# Altium PCB SKR MINI E3V2 PCB.pcbdoc (part 2 of 2)
Units mil, origin at the board's own origin, x right, y up, seen from the top; angles counter-clockwise.
Board outline 4610 x 3845 mil, 2 copper layers (Top Layer, Bottom Layer); 144 components, 119 nets, 524 pads, 201 vias.
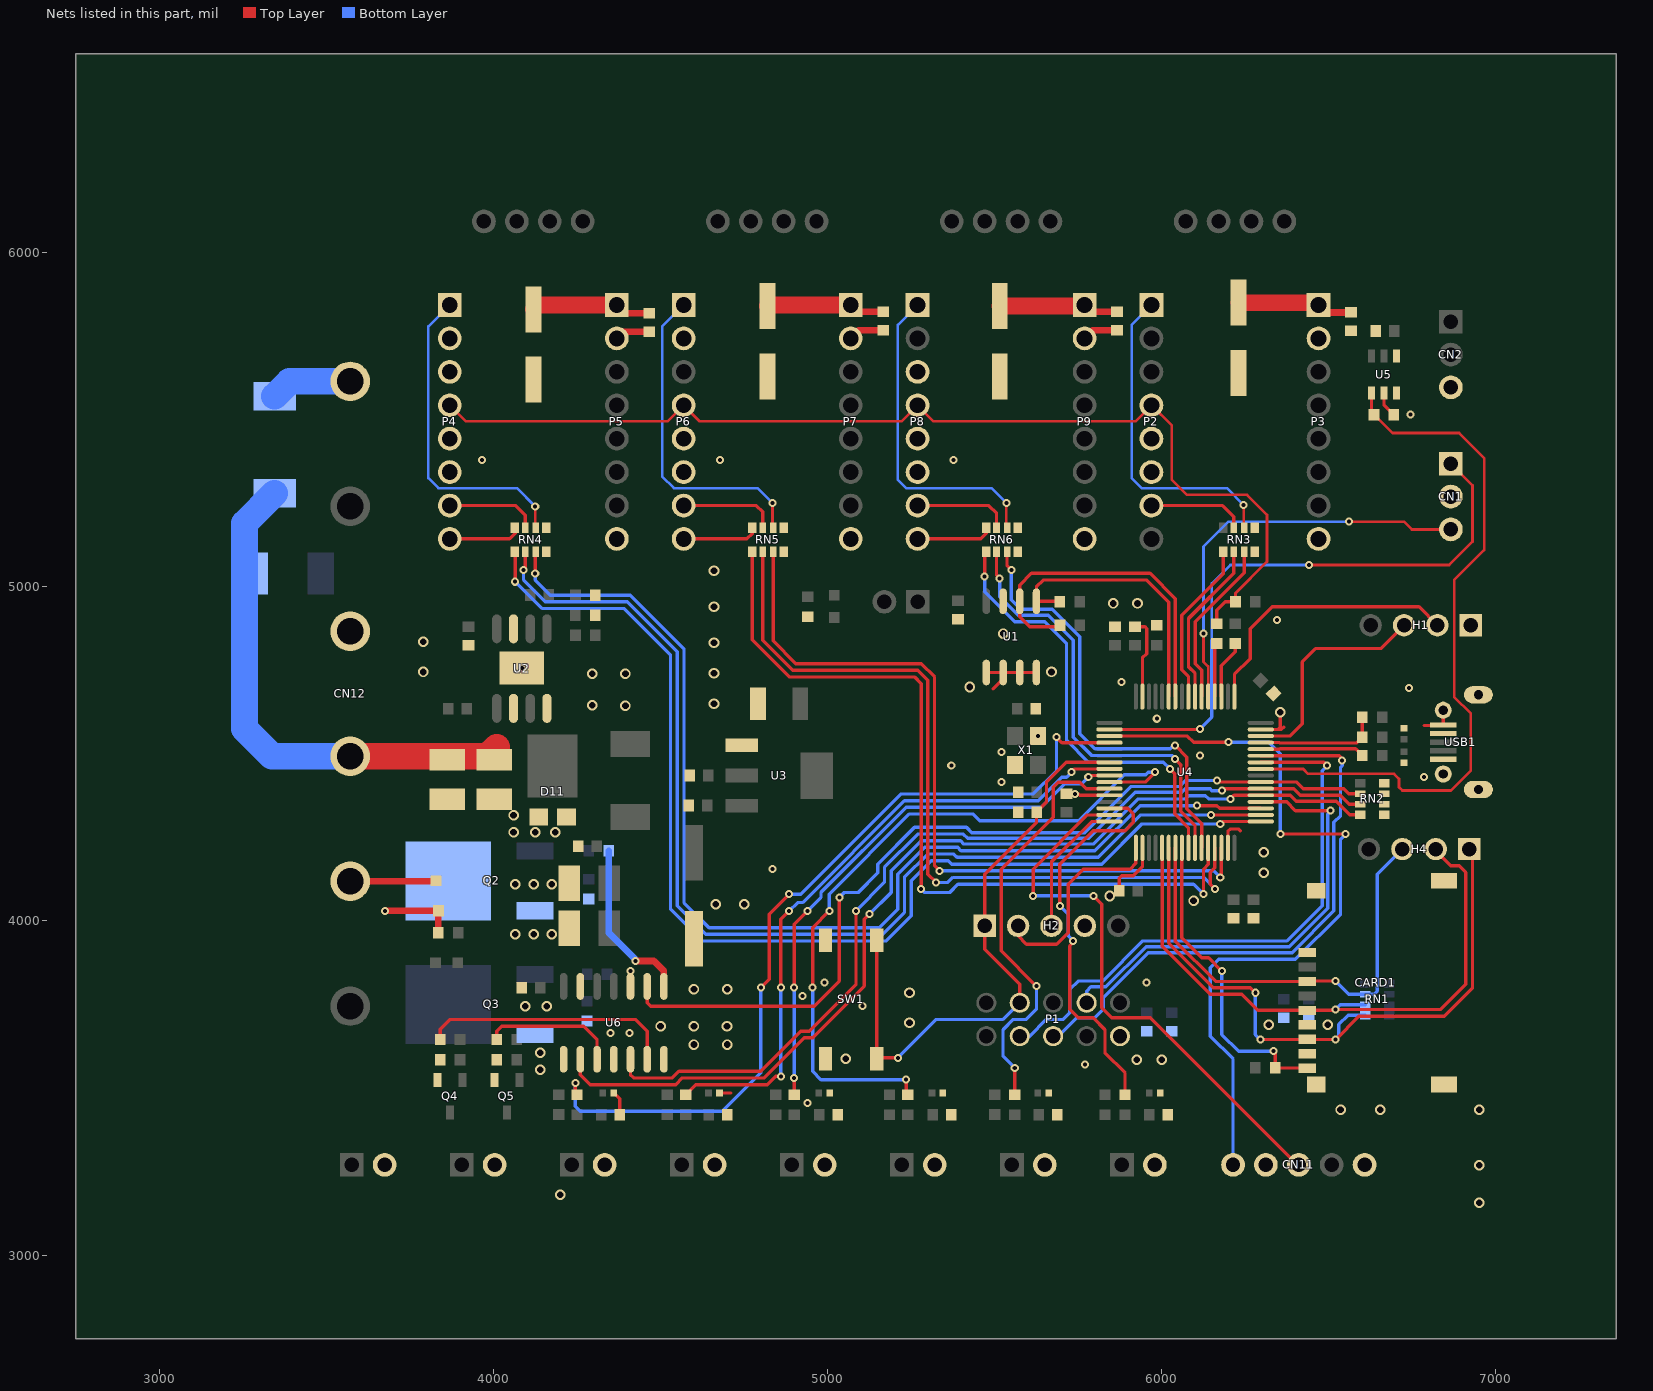
[diagram p2: the nets of this part, all layers, seen from the top]

## Via types
v1: diameter 24.02, hole 12.01, Top Layer to Bottom Layer, 135 vias
v2: diameter 31.5, hole 19.68, Top Layer to Bottom Layer, 64 vias
v3: diameter 47.24, hole 31.5, Top Layer to Bottom Layer, 2 vias

## Nets (pads, with @x,y where several pads share a name; then routed paths per layer and width w, separated by ;. In a path a pad name is that pad's centre, name@x,y a point inside that pad or via, vN(x,y) a via of type N, cw(c..) or ccw(c..) an arc to the next point about the centre after c; other vN are vias at no path point) (continued)
E0-EN: P2.1 RN3.2 | length 980.6
  Top Layer w8: v1(6245,5245) 6245,5178.02 RN3.2@6247,5176.02
  Bottom Layer w8: P2.1@5969.14,5843.15 5910,5784.02 5910,5325 5940,5295 6195,5295 v1(6245,5245)
E0-STOP: R26.1 U4.4 | length 2505.1
  Top Layer w10: v1(4245,3515) 4245,3484.7 R26.1@4250,3479.7 ; v1(4800,3800) 4825,3825 4825,4020 v1(4885,4080) ; v1(5685,4550) 5701.4,4533.6 U4.4@5843.6,4533.6
  Bottom Layer w10: v1(4245,3515) 4245,3445 4260,3430 4685,3430 4800,3545 v1(4800,3800) ; v1(4885,4080) 4920,4080 5220,4380 5615,4380 5685,4450 v1(5685,4550)
E0-STP: P2.7 RN3.3 | length 293.8
  Top Layer w10: P2.7@5969.14,5243.15 6181.85,5243.15 6215.5,5209.5 RN3.3@6215.5,5176.02
E0DIR: RN3.5 U4.56 | length 493.4
  Top Layer w10: U4.56@6079.8,4671.4 6079.8,4731.64 6060,4751.44 6060,4915 6184.1,5039.1 RN3.5@6184.1,5105.22
E0EN: RN3.7 U4.54 | length 502.7
  Top Layer w10: U4.54@6119.2,4671.4 6119.2,4750.8 6100,4770 6100,4895 6247,5042 RN3.7@6247,5105.22
E0STP: RN3.6 U4.55 | length 498
  Top Layer w10: U4.55@6099.5,4671.4 6099.5,4740.42 6080,4759.92 6080,4905 6215.5,5040.5 RN3.6@6215.5,5105.22
FAN: R37.1 U6.6 | length 760.7
  Top Layer w10: R37.1@3840.6,3645 3840.6,3675.6 3870,3705 4425,3705 4460,3670 U6.6@4460,3586
FAN0: R38.1 U6.3 | length 406.7
  Top Layer w10: R38.1@4010.3,3645 4010.3,3670.3 4025,3685 4270,3685 4310,3645 U6.3@4310,3586
FAN0-PWM: RN2.8 U4.37 U6.2 | length 2947.7
  Top Layer w10: U6.2@4260,3586 4260,3540 4290,3510 4545,3510 4565,3530 4810,3530 4930,3650 4955,3650 5110,3805 5110,4005 v1(5125,4020) ; v1(6205,4365) 6216.1,4376.1 U4.37@6296.4,4376.1 6384.35,4376.1 6402.27,4358.19 6521.81,4358.19 6562.2,4317.8 RN2.8@6594.6,4317.8
  Bottom Layer w10: v1(5125,4020) 5190,4085 5190,4150 5280,4240 5397.83,4240 5407.83,4230 5795,4230 5930,4365 6070,4365 6080,4375 6130,4375 6140,4365 v1(6205,4365)
FAN-PWM: RN2.7 U4.38 U6.5 | length 2782.8
  Top Layer w10: U6.5@4410,3586 4410,3540 4420,3530 4535,3530 4555,3550 4800,3550 4920,3670 4945,3670 5085,3810 v1(5085,4030) ; v1(6180,4390) 6185.8,4395.8 U4.38@6296.4,4395.8 6394.49,4395.8 6414.7,4375.59 6534.41,4375.59 6560.7,4349.3 RN2.7@6594.6,4349.3
  Bottom Layer w10: v1(5085,4030) 5170,4115 5170,4160 5270,4260 5406.37,4260 5419.37,4247 5782,4247 5920,4385 6060,4385 6070,4395 6145,4395 6150,4390 v1(6180,4390)
GND: C1.2 C2.2 C3.2 C4.1 C5.1 C6.1 C7.1 C8.1 C9.1 C10.1 C11.1 C12.1 C13.1 C15.1 C16.1 C17.1 C19.1 C20.1 C21.1 C23.1 C24.1 C25.2 C26.1 C27.2 C28.1 C29.1 C30.1 C31.1 C32.1 C33.1 C34.1 C35.1 C36.1 C37.2 C38.1 C39.2 C40.1 C41.2 C42.1 C43.2 C44.1 CARD1.6 CARD1.10 CARD1.11 CARD1.12 CARD1.13 CN1.2 CN2.3 CN4.2 CN5.2 CN6.2 CN7.2 CN8.2 CN9.2 CN11.2 CN11.5 CN12.6 D1.1 D3.1 D4.1 D5.1 D6.1 D7.1 D8.1 D9.1 D10.1 D11.1 D11.2 H1.1 H2.4 P1.2 P3.2 P3.8 P4.2 P4.3 P5.2 P5.8 P6.2 P7.2 P7.8 P8.3 P9.2 P9.8 Q2.3 Q3.3 Q4.2 Q5.2 R1.2 R4.2 R11.1 R13.1 R14.1 R28.1 R32.1 R34.1 R36.1 RN2.1 RN2.2 RN2.3 RN2.4 SW1.3 SW1.4 U1.1 U1.2 U1.3 U1.4 U1.7 U2.4 U2.9 U3.1 U4.12 U4.18 U4.31 U4.47 U4.63 U5.2 U6.1 U6.4 U6.7 U6.10 U6.13 USB1.5 USB1.6 USB1.7 USB1.8 USB1.9 X1.2 X1.4 | length 1831.3
  Top Layer w10: D9.1@4360,3485 4377.6,3467.4 C35.1@4377.6,3420 ; D6.1@4676.4,3485 4710,3485 ; U1.1@5475,4743.5 U1.2@5525,4743.5 ; 5495,4695 5525,4725 U1.2@5525,4743.5 ; U1.4@5625,4743.5 U1.3@5575,4743.5 U1.2@5525,4743.5 ; C7.1@5715,4380 v1(5740,4380) ; v1@5740.2,4380.2 v1(5740,4380) ; U4.12@5843.6,4376.1 5753.9,4376.1 5750,4380 v1(5740,4380) ; C8.1@5872.4,4090 5872.4,4127.4 5880,4135 5915,4135 5942.1,4162.1 U4.18@5942.1,4218.6 ; C4.1@5920,4880.2 5920.2,4880 5950,4880 5955,4875 5955,4800 5942.1,4787.1 U4.63@5942.1,4671.4 ; U4.31@6198,4218.6 6198,4268 6205,4275 6230,4275 6235,4270 ; U4.47@6296.4,4572.9 6357.9,4572.9 6365,4580 ; 6350,4575 6355,4580 v2(6355,4625) ; U5.2@6665,5579.9 6665,5544.7 R11.1@6694.7,5515 ; 6785,4585 6841.5,4585 USB1.5@6842.7,4586.2 6842.7,4630.2 USB1.6@6842.4,4630.5
  Top Layer w20: P5.2@4369.14,5743.15 4389.01,5763.02 C44.1@4466.3,5763.02 ; P7.2@5069.14,5743.15 5094.01,5768.02 C42.1@5166.3,5768.02 ; P9.2@5769.14,5743.15 5794.01,5768.02 C40.1@5866.3,5768.02
  Bottom Layer w80: D3.1@3345,5570 3389.8,5614.8 CN12.6@3571.22,5614.8
  other v1: 4940,3455 5770,3570 4350,3665 4406.61,3665 5105,3745 4925,3775 4990,3815 5955,3815 4410,3850.02 4835,4155 5520,4415 6785,4430 5370,4465 6115,4495.11 5520,4505 5629.4,4553.3 5985,4605 6740.5,4696.72 5880,4715 4085,4757 6345,4900 3965,5380 4677.95,5380 5376.5,5380 6745,5515
  other v2: 6950,3156.87 4200,3180 6950,3268.33 6535,3435 6653.71,3435 6950,3435 4140,3555.13 5925,3585 6000.27,3585 5053.62,3587.8 4140,3605 4600,3630 4699.07,3630 4499.95,3685 4600,3685 4698.89,3685 6319.85,3689 6496.22,3689 5245,3695.14 4095,3745 4160,3745 5245,3785 4600,3795 4699.07,3795 4065,3960 4120,3960 4175,3960 4665,4050 4750.68,4050 6095,4060 5844.7,4074.5 4065,4110 4120,4110 4175,4110 6305,4143.85 6305,4205 4060,4265 4125,4265 4185,4265 4060,4316.32 4395,4644.2 4295,4645.26 4660,4650 5425,4700 4295,4740 4395,4740 4660,4740.85 3790,4745 5670,4745 4660,4832.91 3790,4835 5525,4860 4660,4940 5855,4950 5927.34,4950 4660,5047.73
HE0: R39.1 U6.8 | length 506.7
  Top Layer w20: v1(4425,3880) 4480,3880 4510,3850 U6.8@4510,3804
  Bottom Layer w20: R39.1@4344.7,4210 4344.7,3965.3 4425,3885 v1(4425,3880)
HE0-PWM: RN2.6 U4.39 U6.9 | length 2658.8
  Top Layer w10: U6.9@4460,3804 4460,3755 4470,3745 4960,3745 5035,3820 v1(5035,4070) ; v1(6165,4420) 6169.5,4415.5 U4.39@6296.4,4415.5 6403.51,4415.5 6423.33,4395.68 6544.32,4395.68 6559.2,4380.8 RN2.6@6594.6,4380.8
  Bottom Layer w10: v1(5035,4070) 5050,4085 5091.42,4085 5150,4143.58 5150,4170 5260,4280 5415.62,4280 5431.62,4264 5769,4264 5907,4402 6052,4402 6070,4420 v1(6165,4420)
HE0_CT: CN12.2 LED4.2 Q2.2 | length 257.3
  Top Layer w20: CN12.2@3571.22,4118.8 3826.8,4118.8 LED4.2@3828,4120
LCD-EN: P1.3 U4.36 | length 1374.6
  Top Layer w10: U4.36@6296.4,4356.4 6373.6,4356.4 6400,4330 v1(6505,4330)
  Bottom Layer w10: P1.3@5775,3755 5775,3790 5788,3803 5833,3803 5953,3923 6382.04,3923 6497,4037.96 6497,4320 6505,4328 v1(6505,4330)
NEO: R11.2 U4.41 U5.1 | length 2139.6
  Top Layer w8: U4.41@6296.4,4454.8 6423.39,4454.8 6438.14,4440.06 6694.94,4440.06 6710,4425 6710,4400 6720,4390 6865,4390 6925,4450 6925,4620 6875,4670 6875,5020 6965,5110 6965,5385 6890,5460 6690.3,5460 R11.2@6635.3,5515
  Top Layer w10: U5.1@6627.6,5579.9 6627.6,5522.7 R11.2@6635.3,5515
PC12: CN1.3 U4.53 | length 1235.1
  Top Layer w8: v1(6125,4860) 6125,4775 6138.9,4761.1 U4.53@6138.9,4671.4 ; v1(6560,5195) 6725,5195 6748.4,5171.6 CN1.3@6865,5171.6
  Bottom Layer w8: v1(6125,4860) 6125,5120 6200,5195 v1(6560,5195)
PROBE: CN11.1 U4.3 | length 2294.2
  Top Layer w10: U4.3@5843.6,4553.3 6076.7,4553.3 6095,4535 v1(6200,4535) ; v1@6350,4260 v1(6550,4260)
  Bottom Layer w10: v1(6200,4535) 6320,4535 6355,4500 v1(6355,4260) ; CN11.1@6213.2,3270 6213.2,3586.8 6145,3655 6145,3860 6170,3885 6400,3885 6535,4020 6535,4245 v1(6550,4260)
PS-ON: CN1.1 U4.2 | length 1813.9
  Top Layer w8: v1(6440,5065) 6860,5065 6930,5135 6930,5303.4 CN1.1@6865,5368.4
  Top Layer w10: U4.2@5843.6,4572.9 6112.9,4572.9 v1(6115,4575)
  Bottom Layer w8: 6150,4839.6 6150,5010 6205,5065 v1(6440,5065)
  Bottom Layer w10: v1(6115,4575) 6150,4610 6150,4839.6
RESET: C3.1 H2.1 P1.7 SW1.1 SW1.2 U4.7 | length 1845.2
  Top Layer w10: SW1.1@5146.8,3942.2 SW1.2@5146.8,3587.8 5149,3590 v1(5210,3590) ; P1.7@5575,3755 5575,3810 5470,3915 H2.1@5470,3985 5470,4140 5625.2,4295.2 C3.1@5625.2,4325 5655,4354.8 5655,4415 5714.5,4474.5 U4.7@5843.6,4474.5
  Bottom Layer w10: v1(5210,3590) 5325,3705 5525,3705 P1.7@5575,3755
RX1: P1.6 U4.43 | length 1728.6
  Top Layer w10: U4.43@6296.4,4494.2 6530.8,4494.2 6540,4485 v1(6540,4480)
  Bottom Layer w10: P1.6@5675,3655 5690,3655 5745,3710 5800,3710 5825,3735 5825,3770 5960,3905 6390,3905 6515,4030 6515,4295 6535,4315 6535,4460 6540,4465 v1(6540,4480)
RX2: H2.2 U4.17 | length 624.3
  Top Layer w10: H2.2@5570,3985 5570,3955 5595,3930 5685,3930 5720,3965 5720,4110 5765,4155 5905,4155 5922.4,4172.4 U4.17@5922.4,4218.6
RX4: R31.1 U4.52 | length 161.9
  Top Layer w10: U4.52@6158.6,4671.4 6158.6,4824.2 R31.1@6165,4830.6
SCL1: R2.1 U1.6 U4.58 | length 1034.2
  Top Layer w10: R2.1@5695.3,4885 5690.3,4880 5605,4880 5575,4910 U1.6@5575,4956.5 5575,5005 5610,5040 5965,5040 6040.5,4964.5 U4.58@6040.5,4671.4
SD-DET: CARD1.9 R10.1 U4.24 | length 943.6
  Top Layer w10: U4.24@6060.2,4218.6 6060.2,3949.8 6120,3890 6140,3890 v1(6180,3850) ; v1(6335,3610) 6339.7,3605.3 R10.1@6339.7,3560 6434.4,3560 CARD1.9@6435.3,3559.1
  Bottom Layer w10: v1(6180,3850) 6180,3660 6230,3610 v1(6335,3610)
SDA1: R3.1 U1.5 U4.59 | length 828.3
  Top Layer w10: R3.1@5695,4955 5693.5,4956.5 U1.5@5625,4956.5 5625,5000 5645,5020 5955,5020 6020.8,4954.2 U4.59@6020.8,4671.4
SERVOS: CN11.3 U4.15 | length 1685.7
  Top Layer w10: v1(5615,4075) 5615,4155 5777,4317 U4.15@5843.6,4317 ; v1(5795,4075) 5820,4050 5820,3740 5850,3710 5965.92,3710 6405.92,3270 CN11.3@6410,3270
  Bottom Layer w10: v1(5615,4075) v1(5795,4075)
SPI1-MISO: CARD1.7 H4.1 RN1.1 U4.22 | length 2011.1
  Top Layer w10: U4.22@6020.8,4218.6 6020.8,3933.74 6154.54,3800 6265,3800 v1(6280,3785) ; v1(6295,3645) 6434.5,3645 CARD1.7@6435.3,3645.8 6436.1,3645 v1(6520,3645) 6590,3715 6845,3715 6930,3800 6930,4205 H4.1@6920,4215
  Bottom Layer w10: v1(6280,3785) 6280,3660 v1(6295,3645) ; v1(6520,3645) 6530,3655 6530,3690 6557.8,3717.8 RN1.1@6609.6,3717.8
SPI1-MOSI: CARD1.3 H4.3 RN1.3 U4.23 | length 1410.2
  Top Layer w10: U4.23@6040.5,4218.6 6040.5,3939.5 6161.2,3818.8 CARD1.3@6435.3,3818.8 6436.5,3820 v1(6520,3820)
  Bottom Layer w10: v1(6520,3820) 6559.2,3780.8 RN1.3@6609.6,3780.8 6635.8,3780.8 6645,3790 6645,4140 H4.3@6720,4215
SPI1-SCK: CARD1.5 H4.2 RN1.2 U4.21 | length 1867.7
  Top Layer w10: U4.21@6001.1,4218.6 6001.1,3923.9 6145,3780 6240,3780 6287.8,3732.2 CARD1.5@6435.3,3732.2 6517.2,3732.2 v1(6520,3735) 6835,3735 6910,3810 6910,4145 6890,4165 6865,4165 6820,4210 H4.2@6820,4215
  Bottom Layer w10: v1(6520,3735) 6534.3,3749.3 RN1.2@6609.6,3749.3
SWCLK: H1.2 U4.49 | length 832.9
  Top Layer w10: U4.49@6217.6,4671.4 6217.6,4737.6 6265,4785 6265,4875 6330,4940 6770,4940 H1.2@6825,4885
SWDIO: H1.3 U4.46 | length 674.4
  Top Layer w10: U4.46@6296.4,4553.3 6383.3,4553.3 6420,4590 6420,4775 6460,4815 6655,4815 H1.3@6725,4885
TH0: R15.1 U4.14 | length 1180.8
  Top Layer w10: v1(5695,4045) 5695,4170 5795,4270 5890,4270 5915,4295 5915,4320 5898.3,4336.7 U4.14@5843.6,4336.7 ; v1(5735,3940) 5735,3935 5725,3925 5725,3735 5750,3710 5795,3710 5830,3675 5830,3605 5890,3545 R15.1@5890,3479.7
  Bottom Layer w10: v1(5695,4045) 5720,4020 5720,3955 v1(5735,3940)
THB: R16.1 U4.11 | length 1290.1
  Top Layer w10: R16.1@5560,3479.7 v1(5560,3560) ; v1(5625,3805) 5520,3910 5520,4155 5675,4310 5675,4400 5690,4415 5755,4415 5774.2,4395.8 U4.11@5843.6,4395.8
  Bottom Layer w10: v1(5560,3560) 5525,3595 5525,3675 5555,3705 5595,3705 5625,3735 v1(5625,3805)
TX1: P1.8 U4.42 | length 1736.3
  Top Layer w10: U4.42@6296.4,4474.5 6485.5,4474.5 v1(6495,4465)
  Bottom Layer w10: P1.8@5575,3655 5605,3655 5655,3705 5705,3705 5725,3725 5725,3795 5750,3820 5823.54,3820 5943.54,3940 6375,3940 6480,4045 6480,4450 v1(6495,4465)
TX2: H2.3 U4.16 | length 415.6
  Top Layer w10: H2.3@5670,3985 5670,4177.3 5790.1,4297.4 U4.16@5843.6,4297.4
TX4: R27.1 U4.51 | length 176.2
  Top Layer w10: U4.51@6178.3,4671.4 6178.3,4763.3 6220,4805 R27.1@6220,4830.3
UART: P2.4 P4.4 P6.4 P8.4 R31.2 R33.2 | length 3201.9
  Top Layer w8: P4.4@3869.14,5543.15 3917.29,5495 4520.98,5495 P6.4@4569.14,5543.15 4617.29,5495 5220.98,5495 P8.4@5269.14,5543.15 5317.29,5495 5920.98,5495 P2.4@5969.14,5543.15 6030,5482.29 6030,5320 6075,5275 6255,5275 6315,5215 6315,5075 6220.6,4980.6 R33.2@6220.6,4955
  Top Layer w10: R31.2@6165,4889.7 6165,4930 6190,4955 R33.2@6220.6,4955
USB_DN: R6.1 U4.44 | length 313
  Top Layer w9.7: U4.44@6296.4,4513.9 6352.3,4513.9 6353.8,4515.4 6579.9,4515.4 R6.1@6600.3,4495
USB_DP: R5.1 R8.1 U4.45 | length 371.9
  Top Layer w9.7: U4.45@6296.4,4533.6 6352.3,4533.6 6353.8,4532.1 6582.4,4532.1 R5.1@6600.3,4550
  Top Layer w10: R5.1@6600.3,4550 R8.1@6600.3,4610
VIN: C19.2 C24.2 C37.1 C38.2 C39.1 C40.2 C41.1 C42.2 C43.1 C44.2 CN12.3 CN12.4 CN13.2 CN14.2 D3.2 F1.2 P3.1 P5.1 P7.1 P9.1 R29.2 R30.2 U2.2 | length 3194.9
  Top Layer w20: v1(3675,4030) R29.2@3835.3,4030 3835,4029.7 R30.2@3835,3965 ; P5.1@4369.14,5843.15 4394.07,5818.22 C44.2@4466.3,5818.22 ; P7.1@5069.14,5843.15 5089.07,5823.22 C42.2@5166.3,5823.22 ; P9.1@5769.14,5843.15 5789.07,5823.22 C40.2@5866.3,5823.22 ; P3.1@6469.14,5843.15 6491.47,5820.82 C38.2@6566.3,5820.82
  Top Layer w50: C41.1@4120,5830.1 4133.05,5843.15 P5.1@4369.14,5843.15 ; C43.1@4820,5840.1 4823.05,5843.15 P7.1@5069.14,5843.15 ; C39.1@5515,5840.1 5766.08,5840.1 P9.1@5769.14,5843.15 ; C37.1@6230,5850.1 6462.19,5850.1 P3.1@6469.14,5843.15
  Top Layer w80: CN12.3@3571.22,4492.8 3982.8,4492.8 4010,4520
  Bottom Layer w80: D3.2@3345,5279.8 3255,5189.8 3255,5050 3255,4575 3337.2,4492.8 CN12.3@3571.22,4492.8
X-DIR: P4.8 RN4.4 | length 219.2
  Top Layer w10: P4.8@3869.14,5143.15 4048.15,5143.15 4065,5160 4065,5175.12 RN4.4@4064.1,5176.02
X-EN: P4.1 RN4.2 | length 964.7
  Top Layer w8: v1(4125,5240) 4125,5178.02 RN4.2@4127,5176.02
  Bottom Layer w8: P4.1@3869.14,5843.15 3805,5779.02 3805,5325 3835,5295 4070,5295 v1(4125,5240)
X-STOP: R20.1 U4.8 | length 1947.8
  Top Layer w10: R20.1@4575,3479.7 4605.3,3510 4820,3510 4845,3535 v1(4860,3535) ; v1(4860,3800) 4860,4005 v1(4885,4030) ; v1(5730,4445) 5739.8,4454.8 U4.8@5843.6,4454.8
  Bottom Layer w10: v1(4860,3535) v1(4860,3800) ; v1(4885,4030) 4910,4055 4925,4055 5230,4360 5630,4360 5700,4430 5715,4430 v1(5730,4445)
X-STP: P4.7 RN4.3 | length 276.7
  Top Layer w10: P4.7@3869.14,5243.15 4066.85,5243.15 4095.5,5214.5 RN4.3@4095.5,5176.02
XDIR: RN4.5 U4.33 | length 3430.3
  Top Layer w10: RN4.5@4064.1,5105.22 4065,5104.32 v1(4065,5015) ; v1(6175,4290) 6182.4,4297.4 U4.33@6296.4,4297.4
  Bottom Layer w10: v1(4065,5015) 4145,4935 4390,4935 4530,4795 4530,4035 4625,3940 5175,3940 5250,4015 5250,4120 5310,4180 5361.72,4180 5371.72,4170 5820,4170 5940,4290 v1(6175,4290)
XEN: RN4.7 U4.35 | length 3357.8
  Top Layer w10: v1(4125,5040) 4125,5103.23 RN4.7@4127,5105.22 ; v1(6105,4345) 6165,4345 6173.3,4336.7 U4.35@6296.4,4336.7
  Bottom Layer w10: v1(4125,5040) 4125,5020 4170,4975 4410,4975 4570,4815 4570,4055 4645,3980 5155,3980 5210,4035 5210,4140 5290,4220 5388.94,4220 5398.94,4210 5800,4210 5935,4345 v1(6105,4345)
XSTP: RN4.6 U4.34 | length 3396.3
  Top Layer w10: v1(4090,5050) 4095.5,5055.5 RN4.6@4095.5,5105.22 ; v1(6147,4317) U4.34@6296.4,4317
  Bottom Layer w10: v1(4090,5050) 4090,5020 4155,4955 4400,4955 4550,4805 4550,4045 4635,3960 5165,3960 5230,4025 5230,4130.79 5299.21,4200 5377.19,4200 5387.19,4190 5810,4190 5937,4317 v1(6147,4317)
Y-DIR: P6.8 RN5.4 | length 228.5
  Top Layer w10: P6.8@4569.14,5143.15 4758.15,5143.15 4774.1,5159.1 RN5.4@4774.1,5176.02
Y-EN: P6.1 RN5.2 | length 977.7
  Top Layer w8: v1(4835,5250) 4835,5178.02 RN5.2@4837,5176.02
  Bottom Layer w8: P6.1@4569.14,5843.15 4505,5779.02 4505,5330 4540,5295 4790,5295 v1(4835,5250)
Y-STOP: R22.1 U4.9 | length 1647.1
  Top Layer w10: R22.1@4900,3479.7 v1(4900,3530) ; v1(4900,3800) 4900,3990 v1(4940,4030) ; v1(5780,4430) 5785.2,4435.2 U4.9@5843.6,4435.2
  Bottom Layer w10: v1(4900,3530) v1(4900,3800) ; v1(4940,4030) 4980,4070 4980,4085 5235,4340 5640,4340 5710,4410 5760,4410 v1(5780,4430)
Y-STP: P6.7 RN5.3 | length 292.6
  Top Layer w10: P6.7@4569.14,5243.15 4786.85,5243.15 4805.5,5224.5 RN5.3@4805.5,5176.02
YDIR: RN5.5 U4.28 | length 2455.7
  Top Layer w10: RN5.5@4774.1,5105.22 4774.1,4840.9 4885,4730 5260,4730 5280,4710 v1(5280,4095) ; v1(6125,4080) 6125,4155 6138.9,4168.9 U4.28@6138.9,4218.6
  Bottom Layer w10: v1(5280,4095) 5290,4085 5365,4085 5390,4110 6095,4110 v1(6125,4080)
YEN: RN5.7 U4.30 | length 2319.4
  Top Layer w10: RN5.7@4837,5105.22 4837,4838 4905,4770 5280,4770 5320,4730 5320,4165 v1(5335,4150) ; v1(6175,4130) 6178.3,4133.3 U4.30@6178.3,4218.6
  Bottom Layer w10: v1(5335,4150) 6155,4150 v1(6175,4130)
YSTP: RN5.6 U4.29 | length 2416.2
  Top Layer w10: RN5.6@4805.5,5105.22 4805.5,4839.5 4895,4750 5270,4750 5300,4720 5300,4140 v1(5325,4115) ; U4.29@6158.6,4218.6 6158.6,4158.6 6145,4145 6145,4110 v1(6160,4095)
  Bottom Layer w10: v1(5325,4115) 5360,4115 5375,4130 6125,4130 v1(6160,4095)
Z-DIR: P8.8 RN6.4 | length 229.2
  Top Layer w10: P8.8@5269.14,5143.15 5458.15,5143.15 5475,5160 5475,5175.12 RN6.4@5474.1,5176.02
Z-EN: P8.1 RN6.2 | length 976.4
  Top Layer w8: v1(5535,5250) 5535,5178.02 RN6.2@5537,5176.02
  Bottom Layer w8: P8.1@5269.14,5843.15 5210,5784.02 5210,5320 5235,5295 5490,5295 v1(5535,5250)
Z-STOP: R24.1 U4.10 | length 2180.1
  Top Layer w10: v1(4955,3800) 4955,3980 v1(5005,4030) ; v1(5235,3525) 5235,3484.4 R24.1@5240,3479.4 ; U4.10@5843.6,4415.5 5950.5,4415.5 v1(5980,4445)
  Bottom Layer w10: v1(4955,3800) 4955,3550 4980,3525 v1(5235,3525) ; v1(5005,4030) 5005,4080 5245,4320 5435,4320 5455,4300 5750.96,4300 5887.96,4437 5952,4437 5960,4445 v1(5980,4445)
Z-STP: P8.7 RN6.3 | length 289.6
  Top Layer w10: P8.7@5269.14,5243.15 5481.85,5243.15 5505.5,5219.5 RN6.3@5505.5,5176.02
ZDIR: RN6.5 U4.25 | length 1325.4
  Top Layer w10: v1(5470,5030) 5470,5101.13 RN6.5@5474.1,5105.22 ; v1(6025,4455) 6039,4441 6039,4320.09 6079.8,4279.29 U4.25@6079.8,4218.6
  Bottom Layer w10: v1(5470,5030) 5470,4985 5560,4895 5650,4895 5715,4830 5715,4540 5780,4475 6005,4475 v1(6025,4455)
ZEN: RN6.7 U4.27 | length 1332.9
  Top Layer w10: RN6.7@5537,5105.22 5537,5063 v1(5550,5050) ; v1(6040,4525) 6075,4490 6075,4335 6119.2,4290.8 U4.27@6119.2,4218.6
  Bottom Layer w10: v1(5550,5050) 5550,4960.46 5577.46,4933 5672,4933 5755,4850 5755,4560 5800,4515 6025,4515 v1@6035,4525
ZSTP: RN6.6 U4.26 | length 1326
  Top Layer w10: RN6.6@5505.5,5105.22 5505.5,5034.5 v1(5515,5025) ; v1(6040,4485) 6057,4468 6057,4327.54 6099.5,4285.04 U4.26@6099.5,4218.6
  Bottom Layer w10: v1(5515,5025) 5515,4970 5570,4915 5660,4915 5735,4840 5735,4550 5790,4495 6030,4495 v1(6040,4485)
"": CARD1.1 CARD1.8 P2.5 P2.6 P4.5 P4.6 P6.5 P6.6 P8.5 P8.6 RN3.1 RN3.8 RN4.1 RN4.8 RN5.1 RN5.8 RN6.1 RN6.8 U2.7 U5.3 U5.4 USB1.1 USB1.4

## Polygon pours and split planes (outlines as drawn)
GND on Bottom Layer (solid, remove dead copper, pour order 7): 3000,3000 7110,3000 7110,6345 3000,6345
GND on Top Layer (solid, remove dead copper, pour order 8): 3015.6,3059.99 7075,3059.99 7075,6254.59 3015.6,6254.59
GND on Inner1 (split plane): 6991.91,6224.51 6991.91,3135.1 3115.1,3135.1 3115.1,6224.51
VIN on Top Layer (solid, remove dead copper, pour order 0): 4076.45,4430.32 4076.45,4681.24 4041.24,4681.24 4040,4680 4040,4590 4015,4565 3715,4565 3540,4565 3510,4535 3510,4455 3535,4430 4075,4430 4076.13,4430
VIN on Bottom Layer (solid, remove dead copper, pour order 1): 3412.52,5319.12 3412.52,5179.48 3356.05,5123.01 3356.05,5062.51 3356.05,4963.95 3400,4920 3600,4920 3640,4880 3640,4455 3615,4430 3255,4430 3220,4465 3220,5290 3250,5320 3411.64,5320
$1N164058 on Bottom Layer (solid, remove dead copper, pour order 2): 3450,5320 3450,5166.5 3408.5,5125 3408.5,4986.5 3440,4955 3610,4955 3640,4985 3640,4995 3640,5310 3630,5320
+5V on Top Layer (solid, remove dead copper, pour order 3): 4300,4345 4300,3925 4450,3925 4470,3945 4470,4095 4495,4120 4765,4120 4790,4145 4790,4365 4625,4365 4625,4309.28 4624.68,4308.96 4511.04,4308.96 4475,4345
+3V3 on Top Layer (solid, remove dead copper, pour order 4): 4614.69,4468.46 4614.69,4392.34 4812.34,4392.34 4815,4395 4815,4190 5245,4190 5245,4700 4855.66,4700 4855,4699.34 4855,4467.22 4615.94,4467.22
HE0_CT on Bottom Layer (solid, remove dead copper, pour order 5): 4020,3965 3220,3965 3220,4385 3935,4385 4020,4300
BED_CT on Bottom Layer (solid, remove dead copper, pour order 6): 4020,3940 4020,3593.93 4023.2,3590.73 4023.2,3496.77 4022.1,3495.67 3229.33,3495.67 3220,3505 3220,3945 4015,3945

## Keep-outs
Top Layer:
  region net "": 4290,4480 4290,4359.81 4295.19,4365 4480,4365 4523.29,4321.71 4530,4321.71 4530,4536.2 4528.1,4538.1 4478.46,4538.1 4478.46,4483.46 4475,4480
Board Outline Layer:
  lines w10 net "": 3085,3105 7022.01,3105 7022.01,6254.61 3085,6254.61 3085,3105
Multi-Layer:
  region net "": 3407.83,6057.76 ccw(c3281.85,6057.76) 3155.87,6057.76 ccw(c3281.85,6057.76)
  region net "": 3407.83,3301.85 ccw(c3281.85,3301.85) 3155.87,3301.85 ccw(c3281.85,3301.85)
  region net "": 6951.14,3301.85 ccw(c6825.16,3301.85) 6699.17,3301.85 ccw(c6825.16,3301.85)
  region net "": 6951.14,6057.76 ccw(c6825.16,6057.76) 6699.17,6057.76 ccw(c6825.16,6057.76)

## Other copper
Inner2 (plane layer: these items are gaps in the copper):
  lines w20 net "": 3735,5195 3735,5740 3788.2,5793.2 6640.25,5793.2 6645,5797.95 6645,6245 6640.39,6249.61 3090,6249.61 3090,3110 4115,3110 4115,3455 4115,3475.6 3869.4,3475.6 3800,3545 3735,3610 ; 3735,5250 3735,5025 3735,3610 ; 3767.5,3577.5 3735,3610

## Silkscreen, mask and mechanical layers (free items; w line width, h text height)
Top Silkscreen Layer:
  text "XM" at 3832.24,6067.85 h51.92 r90
  text "YM" at 4532.24,6062.85 h51.92 r90
  text "ZM" at 5227.24,6062.85 h51.92 r90
  text "EM" at 5922.24,6062.85 h51.92 r90
  text "POW IN" at 3370.91,5872.2 h64.9
  text "RGB" at 6605.57,5837.76 h51.92
  text "-" at 3803.04,5595 h65.37 r90
  text "+" at 3803.04,5205 h65.37 r90
  text "TMC2209" at 6393.48,5101.47 h51.92 r90
  text "TMC2209" at 4980.81,5091.67 h51.92 r90
  text "TMC2209" at 5683.9,5091.67 h51.92 r90
  text "TMC2209" at 4277.24,5091.45 h51.92 r90
  text "POW-DET" at 6732.24,5076.45 h51.92 r90
  text "DIO" at 6746.68,4951.68 h38.94 r90
  text "+3V3" at 6636.68,4949.97 h38.94 r90
  text "CLK" at 6841.68,4946.68 h38.94 r90
  text "GND" at 6941.68,4946.68 h38.94 r90
  text "SWD" at 6385.57,4862.76 h51.92
  text "SKR MINI E3V2 - 2207" at 4371.81,4757.76 h51.92
  text "SPI" at 6425.57,4187.76 h51.92
  text "RESET" at 4902.24,3641.01 h51.92 r90
  text "LCD" at 6177.24,3635.57 h51.92 r90
  text "Z-PROBE" at 6201.45,3397.76 h51.92
Bottom Silkscreen Layer:
  text "B2" at 6012.24,5937.85 h51.92 r270
  text "B1" at 6112.24,5937.85 h51.92 r270
  text "A1" at 6207.24,5937.85 h51.92 r270
  text "B2" at 3907.24,5932.85 h51.92 r270
  text "B1" at 4007.24,5932.85 h51.92 r270
  text "A1" at 4102.24,5932.85 h51.92 r270
  text "B2" at 4607.24,5932.85 h51.92 r270
  text "B1" at 4707.24,5932.85 h51.92 r270
  text "A1" at 4802.24,5932.85 h51.92 r270
  text "B2" at 5307.24,5932.85 h51.92 r270
  text "B1" at 5407.24,5932.85 h51.92 r270
  text "A1" at 5502.24,5932.85 h51.92 r270
  text "A2" at 6312.24,5932.85 h51.92 r270
  text "A2" at 4207.24,5927.85 h51.92 r270
  text "A2" at 4907.24,5927.85 h51.92 r270
  text "A2" at 5607.24,5927.85 h51.92 r270
  text "EN" at 4022.85,5822.76 h51.92
  text "VIN" at 4290.57,5822.76 h51.92
  text "EN" at 4718.07,5816.86 h51.92
  text "VIN" at 4985.79,5816.86 h51.92
  text "EN" at 5429.37,5816.86 h51.92
  text "VIN" at 5697.09,5816.86 h51.92
  text "EN" at 6116.67,5813.64 h51.92
  text "VIN" at 6384.39,5813.64 h51.92
  text "+5V" at 6795.39,5766.84 h51.92
  text "GND" at 4295.57,5722.76 h51.92
  text "GND" at 4990.79,5716.86 h51.92
  text "GND" at 5702.09,5716.86 h51.92
  text "GND" at 6389.39,5713.64 h51.92
  text "NEO" at 6795.57,5662.76 h51.92
  text "A2" at 4292.85,5617.76 h51.92
  text "A2" at 4987.85,5617.76 h51.92
  text "A2" at 5697.85,5617.76 h51.92
  text "A2" at 6387.85,5617.76 h51.92
  text "GND" at 6799.39,5568.64 h51.92
  text "UART" at 4108.29,5517.76 h51.92
  text "A1" at 4292.85,5517.76 h51.92
  text "A1" at 4987.85,5517.76 h51.92
  text "A1" at 5697.85,5517.76 h51.92
  text "A1" at 6387.85,5517.76 h51.92
  text "POW-" at 3647.24,5513.29 h51.92 r270
  text "UART" at 4803.51,5511.86 h51.92
  text "UART" at 5514.81,5511.86 h51.92
  text "UART" at 6202.11,5508.64 h51.92
  text "B1" at 4292.85,5417.76 h51.92
  text "B1" at 4987.85,5417.76 h51.92
  text "B1" at 5697.85,5417.76 h51.92
  text "B1" at 6387.85,5417.76 h51.92
  text "PS/ON" at 6786.01,5347.76 h51.92
  text "B2" at 4292.85,5317.76 h51.92
  text "B2" at 4987.85,5317.76 h51.92
  text "B2" at 5697.85,5317.76 h51.92
  text "B2" at 6387.85,5317.76 h51.92
  text "GND" at 6795.57,5242.76 h51.92
  text "STP" at 4055.57,5217.76 h51.92
  text "3V3" at 4295.57,5217.76 h51.92
  text "STP" at 4750.79,5211.86 h51.92
  text "3V3" at 4990.79,5211.86 h51.92
  text "STP" at 5462.09,5211.86 h51.92
  text "3V3" at 5702.09,5211.86 h51.92
  text "STP" at 6149.39,5208.64 h51.92
  text "3V3" at 6389.39,5208.64 h51.92
  text "PC12" at 6793.29,5142.76 h51.92
  text "POW+" at 3642.24,5128.29 h51.92 r270
  text "DIR" at 4055.57,5117.76 h51.92
  text "GND" at 4295.57,5117.76 h51.92
  text "DIR" at 4750.79,5111.86 h51.92
  text "GND" at 4990.79,5111.86 h51.92
  text "DIR" at 5462.09,5111.86 h51.92
  text "GND" at 5702.09,5111.86 h51.92
  text "DIR" at 6149.39,5108.64 h51.92
  text "GND" at 6389.39,5108.64 h51.92
  text "BED+" at 3398.29,4837.76 h51.92
  text "HE0+" at 3398.29,4467.76 h51.92
  text "HE0-" at 3388.29,4092.76 h51.92
  text "RST" at 5407.24,4060.57 h51.92 r270
  text "RX2" at 5512.24,4060.57 h51.92 r270
  text "TX2" at 5612.24,4060.57 h51.92 r270
  text "GND" at 5717.24,4060.57 h51.92 r270
  text "+5V" at 5817.24,4060.57 h51.92 r270
  text "CS" at 6562.24,3992.85 h51.92 r270
  text "SCK" at 6757.24,3990.57 h51.92 r270
  text "MOSI" at 6662.24,3988.29 h51.92 r270
  text "MISO" at 6857.24,3988.29 h51.92 r270
  text "A1" at 5645.01,3803.79 h29.2 r270
  text "RST" at 5545.01,3802.51 h29.2 r270
  text "+5V" at 5845.01,3802.51 h29.2 r270
  text "LCDEN" at 5746.58,3799.94 h29.2 r270
  text "ENC" at 5395.01,3797.51 h29.2 r270
  text "BTN" at 5445.01,3797.51 h29.2 r270
  text "BED-" at 3383.29,3717.76 h51.92
  text "A3" at 5745.01,3538.79 h29.2 r270
  text "TX1" at 5540.01,3522.51 h29.2 r270
  text "RX1" at 5645.01,3522.51 h29.2 r270
  text "GND" at 5840.01,3512.51 h29.2 r270
  text "BEEPER" at 5445.01,3438.66 h29.2 r270
  text "FAN" at 3685.57,3372.76 h51.92
  text "FAN0" at 4013.29,3367.76 h51.92
  text "THB" at 5671.08,3364.56 h51.92
  text "TH0" at 6000.37,3364.56 h51.92
  text "E0-STOP" at 4411.45,3362.76 h51.92
  text "X-STOP" at 4753.73,3362.76 h51.92
  text "Y-STOP" at 5083.73,3362.76 h51.92
  text "Z-STOP" at 5408.73,3362.76 h51.92
  text "GND" at 6257.24,3345.57 h51.92 r270
  text "PROBE" at 6157.24,3341.01 h51.92 r270
  text "GND" at 6545.24,3338.33 h51.92 r270
  text "+5V" at 6447.24,3335.57 h51.92 r270
  text "SERVOS" at 6347.24,3333.73 h51.92 r270
Mechanical Layer:
  circle w1 net "": c3281.85,6057.76 r62.99
  circle w1 net "": c6825.16,6057.76 r62.99
  circle w1 net "": c3281.85,3301.85 r62.99
  circle w1 net "": c6825.16,3301.85 r62.99